# EAGLE board HMC6343-Breakout-Panel-v10 (EAGLE 6.6.0), part 1 of 2
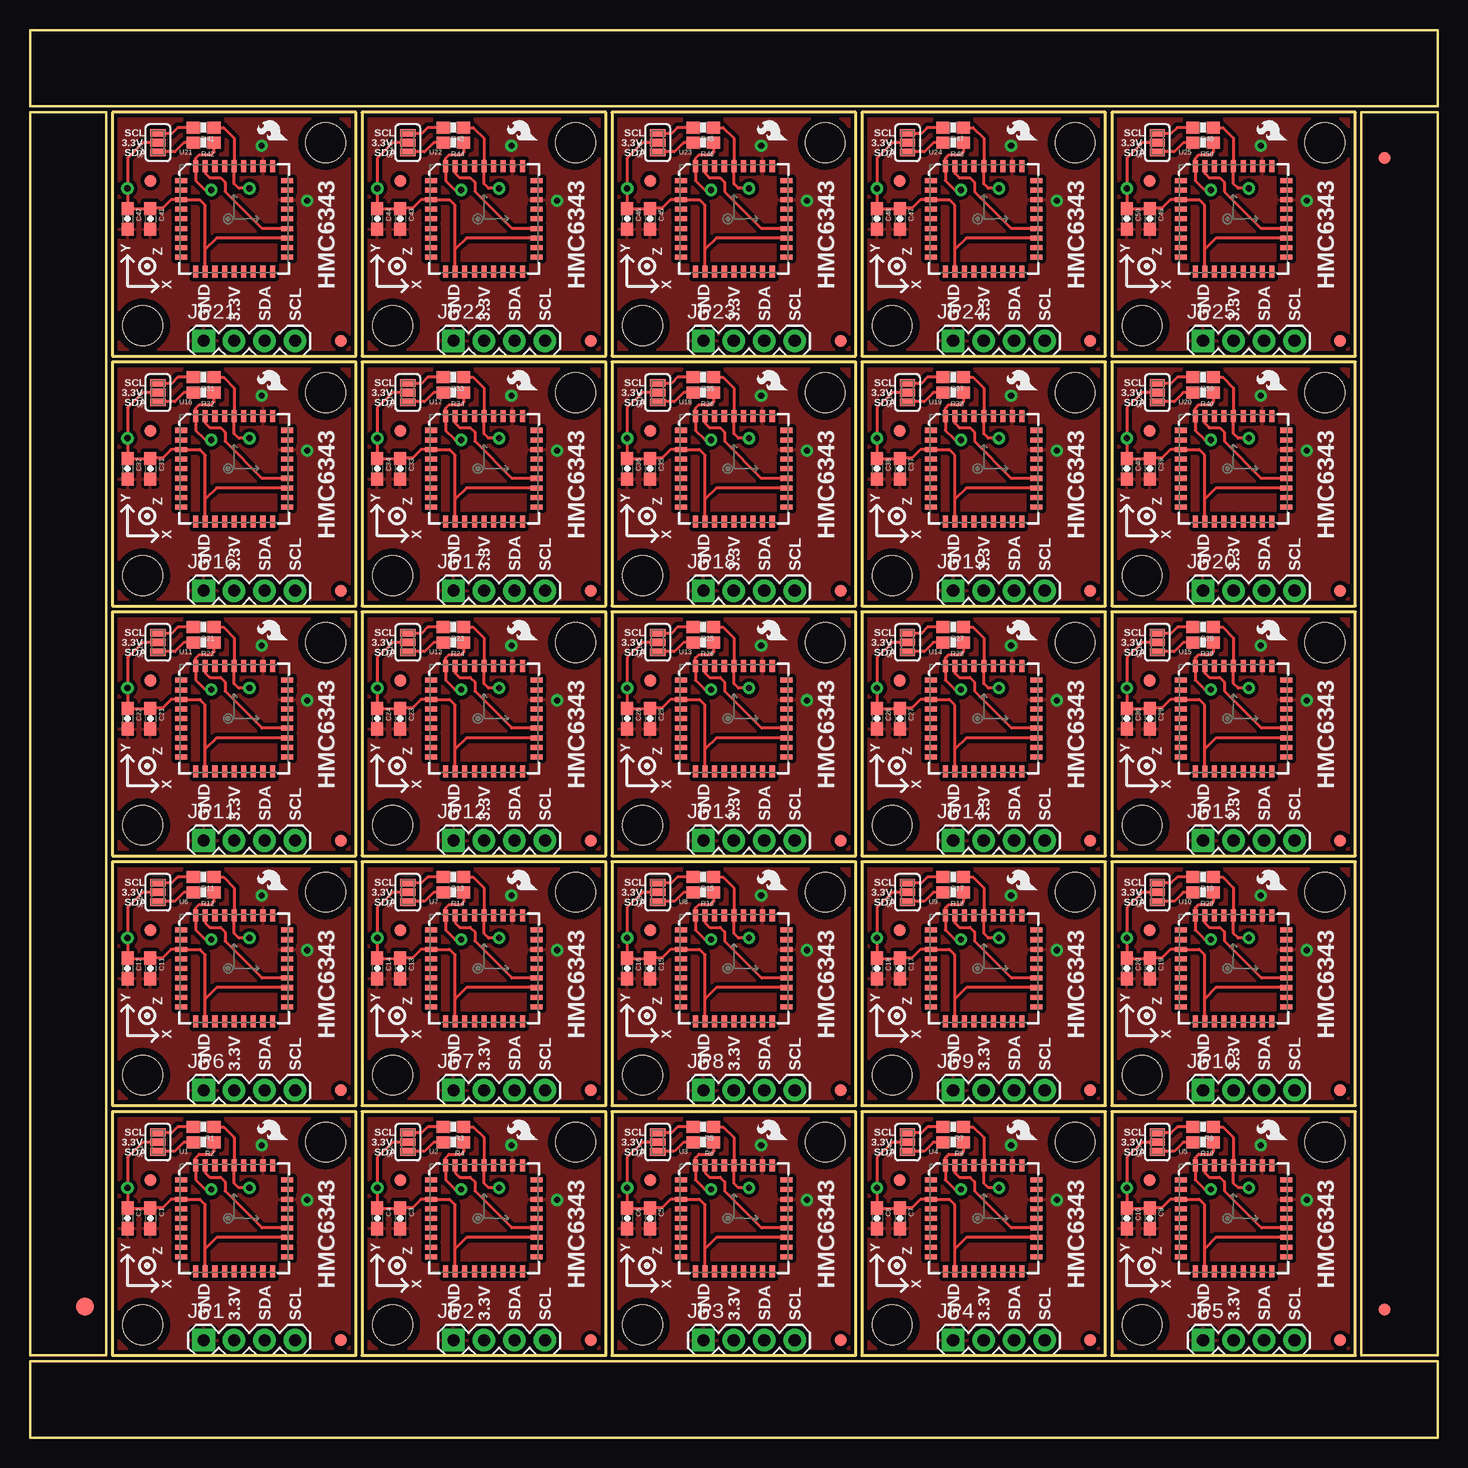
[diagram p0: board, top side]
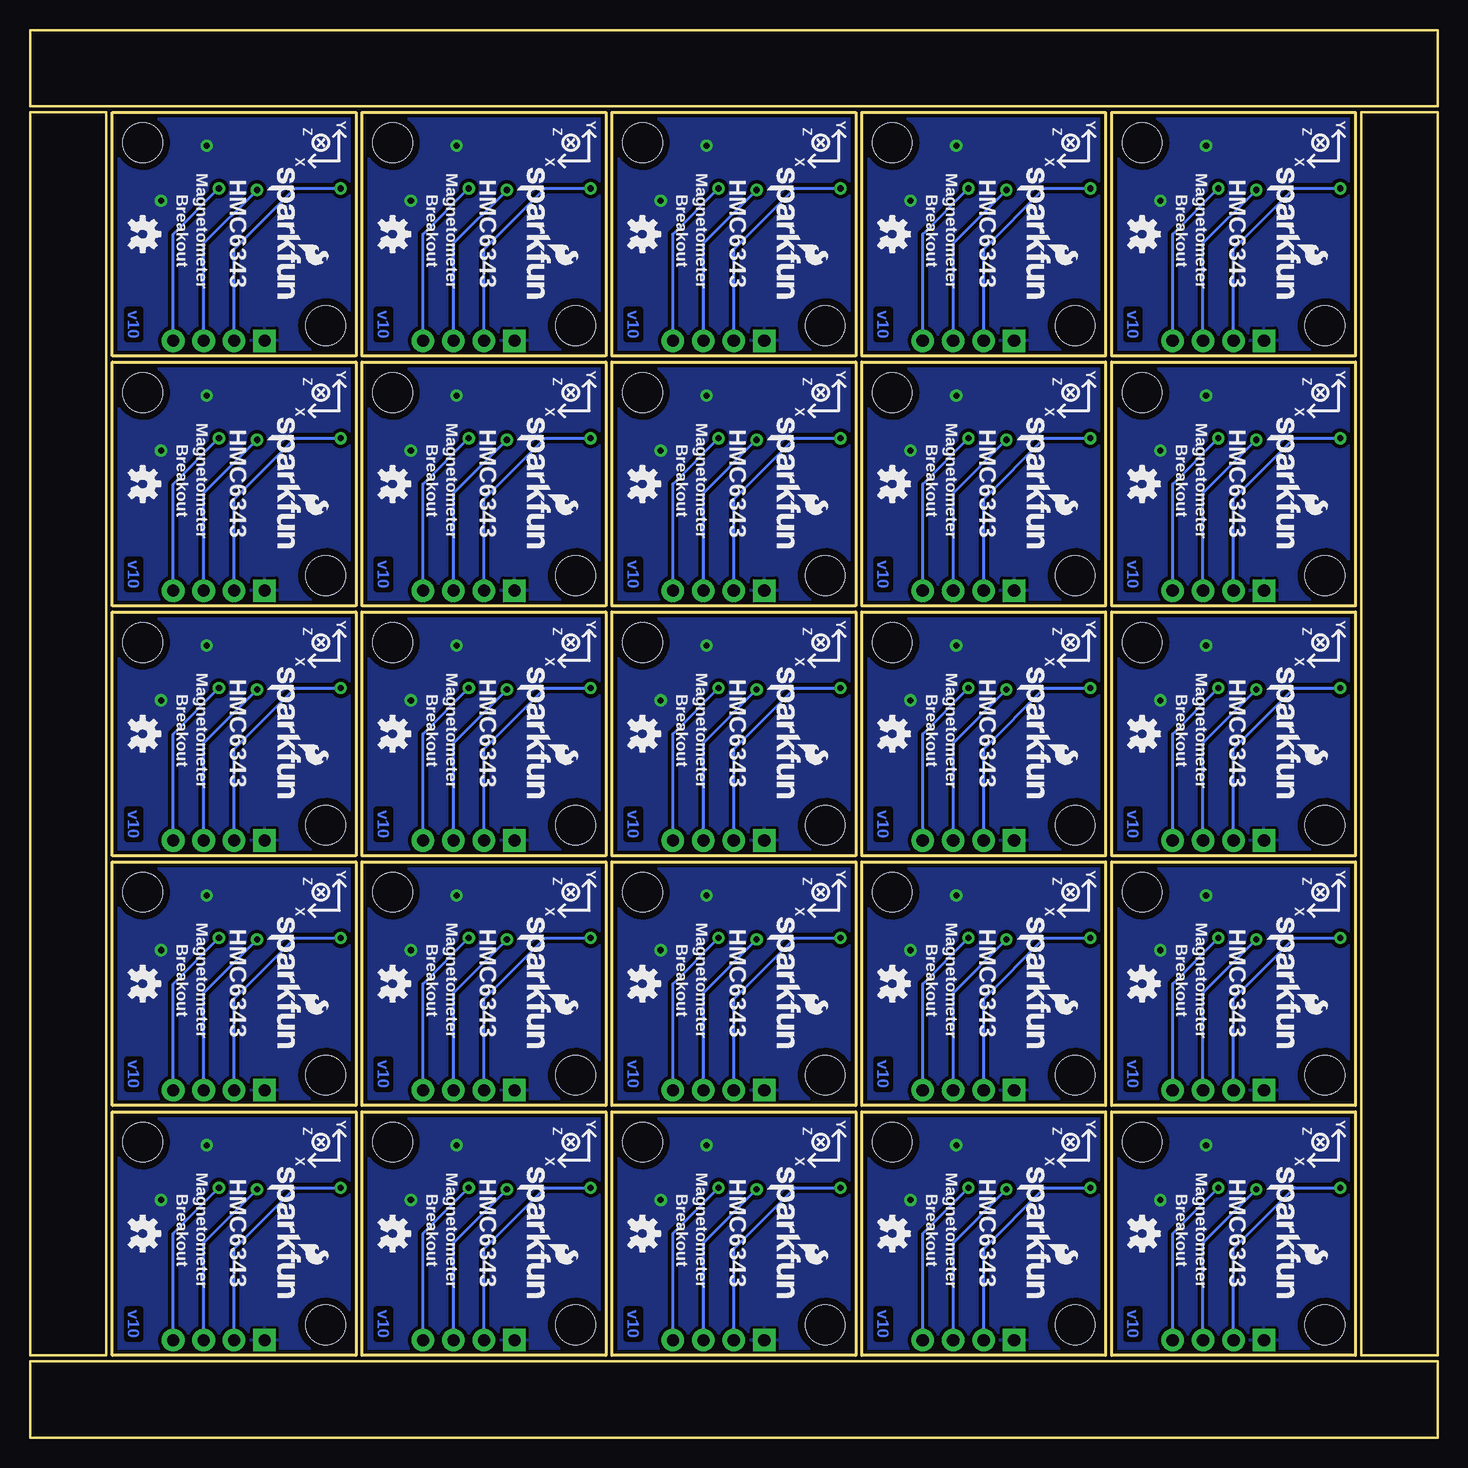
[diagram p1: board, bottom side, seen from below]

Size 117.35 x 117.35 mm. Coordinates in mm from the lower left corner, seen from the top.
Outline: 6.86,6.86 27.18,6.86 27.18,27.18 6.86,27.18 6.86,6.86
Outline: 27.69,6.86 48.01,6.86 48.01,27.18 27.69,27.18 27.69,6.86
Outline: 48.51,6.86 68.83,6.86 68.83,27.18 48.51,27.18 48.51,6.86
Outline: 69.34,6.86 89.66,6.86 89.66,27.18 69.34,27.18 69.34,6.86
Outline: 90.17,6.86 110.49,6.86 110.49,27.18 90.17,27.18 90.17,6.86
Outline: 6.86,27.69 27.18,27.69 27.18,48.01 6.86,48.01 6.86,27.69
Outline: 27.69,27.69 48.01,27.69 48.01,48.01 27.69,48.01 27.69,27.69
Outline: 48.51,27.69 68.83,27.69 68.83,48.01 48.51,48.01 48.51,27.69
Outline: 69.34,27.69 89.66,27.69 89.66,48.01 69.34,48.01 69.34,27.69
Outline: 90.17,27.69 110.49,27.69 110.49,48.01 90.17,48.01 90.17,27.69
Outline: 6.86,48.51 27.18,48.51 27.18,68.83 6.86,68.83 6.86,48.51
Outline: 27.69,48.51 48.01,48.51 48.01,68.83 27.69,68.83 27.69,48.51
Outline: 48.51,48.51 68.83,48.51 68.83,68.83 48.51,68.83 48.51,48.51
Outline: 69.34,48.51 89.66,48.51 89.66,68.83 69.34,68.83 69.34,48.51
Outline: 90.17,48.51 110.49,48.51 110.49,68.83 90.17,68.83 90.17,48.51
Outline: 6.86,69.34 27.18,69.34 27.18,89.66 6.86,89.66 6.86,69.34
Outline: 27.69,69.34 48.01,69.34 48.01,89.66 27.69,89.66 27.69,69.34
Outline: 48.51,69.34 68.83,69.34 68.83,89.66 48.51,89.66 48.51,69.34
Outline: 69.34,69.34 89.66,69.34 89.66,89.66 69.34,89.66 69.34,69.34
Outline: 90.17,69.34 110.49,69.34 110.49,89.66 90.17,89.66 90.17,69.34
Outline: 6.86,90.17 27.18,90.17 27.18,110.49 6.86,110.49 6.86,90.17
Outline: 27.69,90.17 48.01,90.17 48.01,110.49 27.69,110.49 27.69,90.17
Outline: 48.51,90.17 68.83,90.17 68.83,110.49 48.51,110.49 48.51,90.17
Outline: 69.34,90.17 89.66,90.17 89.66,110.49 69.34,110.49 69.34,90.17
Outline: 90.17,90.17 110.49,90.17 110.49,110.49 90.17,110.49 90.17,90.17
Outline: 6.35,6.86 6.35,110.49 0,110.49 0,6.86 6.35,6.86
Outline: 0,0 117.35,0 117.35,6.35 0,6.35 0,0
Outline: 117.35,6.86 117.35,110.49 111,110.49 111,6.86 117.35,6.86
Outline: 117.35,117.35 0,117.35 0,111 117.35,111 117.35,117.35
Copper layers (1*16): Top 0.035mm / dielectric 1.5mm / Bottom 0.035mm
Design rules "SparkFun": minimum track width 8mil, minimum drill 20mil, track to track 8mil, track to pad 8mil, pad to pad 8mil, via to via 8mil, smd to smd 8mil, copper to edge 8mil, drill to drill 8mil, minimum pad ring 12mil, minimum via ring 10mil, stop-mask expansion 4mil, vias tented up to drill 20mil, thermal gap 10mil

## Footprints (pad centres in the part's own frame; a part is rotated, then mirrored left to right if it is on the bottom)
0603-CAP = smd 1.1 x 1: 1 -0.85,0; 2 0.85,0
FIDUCIAL-1.5X3 = smd 1.5 x 1.5: 1 0,0
FIDUCIAL-1X2 = smd 1 x 1: 1 0,0
1X04 = drill 1.016 pad 1.88 square: 1 0,0 | drill 1.016 pad 1.88: 2 2.54,0; 3 5.08,0; 4 7.62,0
0603-RES = smd 1.1 x 1: 1 -0.85,0; 2 0.85,0
SJ_3_PASTE1&2&3 = smd 0.635 x 1.27: 1 -0.813,0; 2 0,0; 3 0.813,0
STAND-OFF = hole 3.302: 0,0
LCC36 = smd 1 x 0.42: 1 -4.4,3.2; 2 -4.4,2.4; 3 -4.4,1.6; 4 -4.4,0.8; 5 -4.4,0; 6 -4.4,-0.8; 7 -4.4,-1.6; 8 -4.4,-2.4; 9 -4.4,-3.2; 19 4.4,-3.2; 20 4.4,-2.4; 21 4.4,-1.6; 22 4.4,-0.8; 23 4.4,0; 24 4.4,0.8; 25 4.4,1.6; 26 4.4,2.4; 27 4.4,3.2 | smd 0.42 x 1: 10 -3.2,-4.4; 11 -2.4,-4.4; 12 -1.6,-4.4; 13 -0.8,-4.4; 14 0,-4.4; 15 0.8,-4.4; 16 1.6,-4.4; 17 2.4,-4.4; 18 3.2,-4.4; 28 3.2,4.4; 29 2.4,4.4; 30 1.6,4.4; 31 0.8,4.4; 32 0,4.4; 33 -0.8,4.4; 34 -1.6,4.4; 35 -2.4,4.4; 36 -3.2,4.4

## Placement (x,y rotation side)
C1  0.1uF  [0603-CAP]  10.03,18.29 270 top
C2  1.0uF  [0603-CAP]  8.13,18.29 270 top
C3  0.1uF  [0603-CAP]  30.86,18.29 270 top
C4  1.0uF  [0603-CAP]  28.96,18.29 270 top
C5  0.1uF  [0603-CAP]  51.69,18.29 270 top
C6  1.0uF  [0603-CAP]  49.78,18.29 270 top
C7  0.1uF  [0603-CAP]  72.52,18.29 270 top
C8  1.0uF  [0603-CAP]  70.61,18.29 270 top
C9  0.1uF  [0603-CAP]  93.34,18.29 270 top
C10  1.0uF  [0603-CAP]  91.44,18.29 270 top
C11  0.1uF  [0603-CAP]  10.03,39.12 270 top
C12  1.0uF  [0603-CAP]  8.13,39.12 270 top
C13  0.1uF  [0603-CAP]  30.86,39.12 270 top
C14  1.0uF  [0603-CAP]  28.96,39.12 270 top
C15  0.1uF  [0603-CAP]  51.69,39.12 270 top
C16  1.0uF  [0603-CAP]  49.78,39.12 270 top
C17  0.1uF  [0603-CAP]  72.52,39.12 270 top
C18  1.0uF  [0603-CAP]  70.61,39.12 270 top
C19  0.1uF  [0603-CAP]  93.34,39.12 270 top
C20  1.0uF  [0603-CAP]  91.44,39.12 270 top
C21  0.1uF  [0603-CAP]  10.03,59.94 270 top
C22  1.0uF  [0603-CAP]  8.13,59.94 270 top
C23  0.1uF  [0603-CAP]  30.86,59.94 270 top
C24  1.0uF  [0603-CAP]  28.96,59.94 270 top
C25  0.1uF  [0603-CAP]  51.69,59.94 270 top
C26  1.0uF  [0603-CAP]  49.78,59.94 270 top
C27  0.1uF  [0603-CAP]  72.52,59.94 270 top
C28  1.0uF  [0603-CAP]  70.61,59.94 270 top
C29  0.1uF  [0603-CAP]  93.34,59.94 270 top
C30  1.0uF  [0603-CAP]  91.44,59.94 270 top
C31  0.1uF  [0603-CAP]  10.03,80.77 270 top
C32  1.0uF  [0603-CAP]  8.13,80.77 270 top
C33  0.1uF  [0603-CAP]  30.86,80.77 270 top
C34  1.0uF  [0603-CAP]  28.96,80.77 270 top
C35  0.1uF  [0603-CAP]  51.69,80.77 270 top
C36  1.0uF  [0603-CAP]  49.78,80.77 270 top
C37  0.1uF  [0603-CAP]  72.52,80.77 270 top
C38  1.0uF  [0603-CAP]  70.61,80.77 270 top
C39  0.1uF  [0603-CAP]  93.34,80.77 270 top
C40  1.0uF  [0603-CAP]  91.44,80.77 270 top
C41  0.1uF  [0603-CAP]  10.03,101.6 270 top
C42  1.0uF  [0603-CAP]  8.13,101.6 270 top
C43  0.1uF  [0603-CAP]  30.86,101.6 270 top
C44  1.0uF  [0603-CAP]  28.96,101.6 270 top
C45  0.1uF  [0603-CAP]  51.69,101.6 270 top
C46  1.0uF  [0603-CAP]  49.78,101.6 270 top
C47  0.1uF  [0603-CAP]  72.52,101.6 270 top
C48  1.0uF  [0603-CAP]  70.61,101.6 270 top
C49  0.1uF  [0603-CAP]  93.34,101.6 270 top
C50  1.0uF  [0603-CAP]  91.44,101.6 270 top
E$1  [FIDUCIAL-1.5X3]  4.57,10.92 0 top
E$4  [FIDUCIAL-1X2]  112.9,10.67 0 top
E$6  [FIDUCIAL-1X2]  112.9,106.68 180 top
FID1  FIDUCIAL1X2  [FIDUCIAL-1X2]  25.91,8.13 0 top
FID2  FIDUCIAL1X2  [FIDUCIAL-1X2]  10.03,21.46 0 top
FID3  FIDUCIAL1X2  [FIDUCIAL-1X2]  46.74,8.13 0 top
FID4  FIDUCIAL1X2  [FIDUCIAL-1X2]  30.86,21.46 0 top
FID5  FIDUCIAL1X2  [FIDUCIAL-1X2]  67.56,8.13 0 top
FID6  FIDUCIAL1X2  [FIDUCIAL-1X2]  51.69,21.46 0 top
FID7  FIDUCIAL1X2  [FIDUCIAL-1X2]  88.39,8.13 0 top
FID8  FIDUCIAL1X2  [FIDUCIAL-1X2]  72.52,21.46 0 top
FID9  FIDUCIAL1X2  [FIDUCIAL-1X2]  109.22,8.13 0 top
FID10  FIDUCIAL1X2  [FIDUCIAL-1X2]  93.34,21.46 0 top
FID11  FIDUCIAL1X2  [FIDUCIAL-1X2]  25.91,28.96 0 top
FID12  FIDUCIAL1X2  [FIDUCIAL-1X2]  10.03,42.29 0 top
FID13  FIDUCIAL1X2  [FIDUCIAL-1X2]  46.74,28.96 0 top
FID14  FIDUCIAL1X2  [FIDUCIAL-1X2]  30.86,42.29 0 top
FID15  FIDUCIAL1X2  [FIDUCIAL-1X2]  67.56,28.96 0 top
FID16  FIDUCIAL1X2  [FIDUCIAL-1X2]  51.69,42.29 0 top
FID17  FIDUCIAL1X2  [FIDUCIAL-1X2]  88.39,28.96 0 top
FID18  FIDUCIAL1X2  [FIDUCIAL-1X2]  72.52,42.29 0 top
FID19  FIDUCIAL1X2  [FIDUCIAL-1X2]  109.22,28.96 0 top
FID20  FIDUCIAL1X2  [FIDUCIAL-1X2]  93.34,42.29 0 top
FID21  FIDUCIAL1X2  [FIDUCIAL-1X2]  25.91,49.78 0 top
FID22  FIDUCIAL1X2  [FIDUCIAL-1X2]  10.03,63.12 0 top
FID23  FIDUCIAL1X2  [FIDUCIAL-1X2]  46.74,49.78 0 top
FID24  FIDUCIAL1X2  [FIDUCIAL-1X2]  30.86,63.12 0 top
FID25  FIDUCIAL1X2  [FIDUCIAL-1X2]  67.56,49.78 0 top
FID26  FIDUCIAL1X2  [FIDUCIAL-1X2]  51.69,63.12 0 top
FID27  FIDUCIAL1X2  [FIDUCIAL-1X2]  88.39,49.78 0 top
FID28  FIDUCIAL1X2  [FIDUCIAL-1X2]  72.52,63.12 0 top
FID29  FIDUCIAL1X2  [FIDUCIAL-1X2]  109.22,49.78 0 top
FID30  FIDUCIAL1X2  [FIDUCIAL-1X2]  93.34,63.12 0 top
FID31  FIDUCIAL1X2  [FIDUCIAL-1X2]  25.91,70.61 0 top
FID32  FIDUCIAL1X2  [FIDUCIAL-1X2]  10.03,83.95 0 top
FID33  FIDUCIAL1X2  [FIDUCIAL-1X2]  46.74,70.61 0 top
FID34  FIDUCIAL1X2  [FIDUCIAL-1X2]  30.86,83.95 0 top
FID35  FIDUCIAL1X2  [FIDUCIAL-1X2]  67.56,70.61 0 top
FID36  FIDUCIAL1X2  [FIDUCIAL-1X2]  51.69,83.95 0 top
FID37  FIDUCIAL1X2  [FIDUCIAL-1X2]  88.39,70.61 0 top
FID38  FIDUCIAL1X2  [FIDUCIAL-1X2]  72.52,83.95 0 top
FID39  FIDUCIAL1X2  [FIDUCIAL-1X2]  109.22,70.61 0 top
FID40  FIDUCIAL1X2  [FIDUCIAL-1X2]  93.34,83.95 0 top
FID41  FIDUCIAL1X2  [FIDUCIAL-1X2]  25.91,91.44 0 top
FID42  FIDUCIAL1X2  [FIDUCIAL-1X2]  10.03,104.78 0 top
FID43  FIDUCIAL1X2  [FIDUCIAL-1X2]  46.74,91.44 0 top
FID44  FIDUCIAL1X2  [FIDUCIAL-1X2]  30.86,104.78 0 top
FID45  FIDUCIAL1X2  [FIDUCIAL-1X2]  67.56,91.44 0 top
FID46  FIDUCIAL1X2  [FIDUCIAL-1X2]  51.69,104.78 0 top
FID47  FIDUCIAL1X2  [FIDUCIAL-1X2]  88.39,91.44 0 top
FID48  FIDUCIAL1X2  [FIDUCIAL-1X2]  72.52,104.78 0 top
FID49  FIDUCIAL1X2  [FIDUCIAL-1X2]  109.22,91.44 0 top
FID50  FIDUCIAL1X2  [FIDUCIAL-1X2]  93.34,104.78 0 top
JP1  [1X04]  14.48,8.13 0 top
JP2  [1X04]  35.31,8.13 0 top
JP3  [1X04]  56.13,8.13 0 top
JP4  [1X04]  76.96,8.13 0 top
JP5  [1X04]  97.79,8.13 0 top
JP6  [1X04]  14.48,28.96 0 top
JP7  [1X04]  35.31,28.96 0 top
JP8  [1X04]  56.13,28.96 0 top
JP9  [1X04]  76.96,28.96 0 top
JP10  [1X04]  97.79,28.96 0 top
JP11  [1X04]  14.48,49.78 0 top
JP12  [1X04]  35.31,49.78 0 top
JP13  [1X04]  56.13,49.78 0 top
JP14  [1X04]  76.96,49.78 0 top
JP15  [1X04]  97.79,49.78 0 top
JP16  [1X04]  14.48,70.61 0 top
JP17  [1X04]  35.31,70.61 0 top
JP18  [1X04]  56.13,70.61 0 top
JP19  [1X04]  76.96,70.61 0 top
JP20  [1X04]  97.79,70.61 0 top
JP21  [1X04]  14.48,91.44 0 top
JP22  [1X04]  35.31,91.44 0 top
JP23  [1X04]  56.13,91.44 0 top
JP24  [1X04]  76.96,91.44 0 top
JP25  [1X04]  97.79,91.44 0 top
LOGO1  SFE_LOGO_FLAME.1_INCH  [SFE_LOGO_FLAME_.1]  21.84,24.51 90 top
LOGO2  SFE_LOGO_NAME_FLAME.1_INCH  [SFE_LOGO_NAME_FLAME_.1]  14.35,22.99 270 bottom
LOGO3  OSHW-LOGOS  [OSHW-LOGO-S]  24.64,17.02 270 bottom
LOGO4  SFE_LOGO_FLAME.1_INCH  [SFE_LOGO_FLAME_.1]  42.67,24.51 90 top
LOGO5  SFE_LOGO_NAME_FLAME.1_INCH  [SFE_LOGO_NAME_FLAME_.1]  35.18,22.99 270 bottom
LOGO6  OSHW-LOGOS  [OSHW-LOGO-S]  45.47,17.02 270 bottom
LOGO7  SFE_LOGO_FLAME.1_INCH  [SFE_LOGO_FLAME_.1]  63.5,24.51 90 top
LOGO8  SFE_LOGO_NAME_FLAME.1_INCH  [SFE_LOGO_NAME_FLAME_.1]  56.01,22.99 270 bottom
LOGO9  OSHW-LOGOS  [OSHW-LOGO-S]  66.29,17.02 270 bottom
LOGO10  SFE_LOGO_FLAME.1_INCH  [SFE_LOGO_FLAME_.1]  84.33,24.51 90 top
LOGO11  SFE_LOGO_NAME_FLAME.1_INCH  [SFE_LOGO_NAME_FLAME_.1]  76.83,22.99 270 bottom
LOGO12  OSHW-LOGOS  [OSHW-LOGO-S]  87.12,17.02 270 bottom
LOGO13  SFE_LOGO_FLAME.1_INCH  [SFE_LOGO_FLAME_.1]  105.16,24.51 90 top
LOGO14  SFE_LOGO_NAME_FLAME.1_INCH  [SFE_LOGO_NAME_FLAME_.1]  97.66,22.99 270 bottom
LOGO15  OSHW-LOGOS  [OSHW-LOGO-S]  107.95,17.02 270 bottom
LOGO16  SFE_LOGO_FLAME.1_INCH  [SFE_LOGO_FLAME_.1]  21.84,45.34 90 top
LOGO17  SFE_LOGO_NAME_FLAME.1_INCH  [SFE_LOGO_NAME_FLAME_.1]  14.35,43.81 270 bottom
LOGO18  OSHW-LOGOS  [OSHW-LOGO-S]  24.64,37.85 270 bottom
LOGO19  SFE_LOGO_FLAME.1_INCH  [SFE_LOGO_FLAME_.1]  42.67,45.34 90 top
LOGO20  SFE_LOGO_NAME_FLAME.1_INCH  [SFE_LOGO_NAME_FLAME_.1]  35.18,43.81 270 bottom
LOGO21  OSHW-LOGOS  [OSHW-LOGO-S]  45.47,37.85 270 bottom
LOGO22  SFE_LOGO_FLAME.1_INCH  [SFE_LOGO_FLAME_.1]  63.5,45.34 90 top
LOGO23  SFE_LOGO_NAME_FLAME.1_INCH  [SFE_LOGO_NAME_FLAME_.1]  56.01,43.81 270 bottom
LOGO24  OSHW-LOGOS  [OSHW-LOGO-S]  66.29,37.85 270 bottom
LOGO25  SFE_LOGO_FLAME.1_INCH  [SFE_LOGO_FLAME_.1]  84.33,45.34 90 top
LOGO26  SFE_LOGO_NAME_FLAME.1_INCH  [SFE_LOGO_NAME_FLAME_.1]  76.83,43.81 270 bottom
LOGO27  OSHW-LOGOS  [OSHW-LOGO-S]  87.12,37.85 270 bottom
LOGO28  SFE_LOGO_FLAME.1_INCH  [SFE_LOGO_FLAME_.1]  105.16,45.34 90 top
LOGO29  SFE_LOGO_NAME_FLAME.1_INCH  [SFE_LOGO_NAME_FLAME_.1]  97.66,43.81 270 bottom
LOGO30  OSHW-LOGOS  [OSHW-LOGO-S]  107.95,37.85 270 bottom
LOGO31  SFE_LOGO_FLAME.1_INCH  [SFE_LOGO_FLAME_.1]  21.84,66.17 90 top
LOGO32  SFE_LOGO_NAME_FLAME.1_INCH  [SFE_LOGO_NAME_FLAME_.1]  14.35,64.64 270 bottom
LOGO33  OSHW-LOGOS  [OSHW-LOGO-S]  24.64,58.67 270 bottom
LOGO34  SFE_LOGO_FLAME.1_INCH  [SFE_LOGO_FLAME_.1]  42.67,66.17 90 top
LOGO35  SFE_LOGO_NAME_FLAME.1_INCH  [SFE_LOGO_NAME_FLAME_.1]  35.18,64.64 270 bottom
LOGO36  OSHW-LOGOS  [OSHW-LOGO-S]  45.47,58.67 270 bottom
LOGO37  SFE_LOGO_FLAME.1_INCH  [SFE_LOGO_FLAME_.1]  63.5,66.17 90 top
LOGO38  SFE_LOGO_NAME_FLAME.1_INCH  [SFE_LOGO_NAME_FLAME_.1]  56.01,64.64 270 bottom
LOGO39  OSHW-LOGOS  [OSHW-LOGO-S]  66.29,58.67 270 bottom
LOGO40  SFE_LOGO_FLAME.1_INCH  [SFE_LOGO_FLAME_.1]  84.33,66.17 90 top
LOGO41  SFE_LOGO_NAME_FLAME.1_INCH  [SFE_LOGO_NAME_FLAME_.1]  76.83,64.64 270 bottom
LOGO42  OSHW-LOGOS  [OSHW-LOGO-S]  87.12,58.67 270 bottom
LOGO43  SFE_LOGO_FLAME.1_INCH  [SFE_LOGO_FLAME_.1]  105.16,66.17 90 top
LOGO44  SFE_LOGO_NAME_FLAME.1_INCH  [SFE_LOGO_NAME_FLAME_.1]  97.66,64.64 270 bottom
LOGO45  OSHW-LOGOS  [OSHW-LOGO-S]  107.95,58.67 270 bottom
LOGO46  SFE_LOGO_FLAME.1_INCH  [SFE_LOGO_FLAME_.1]  21.84,87 90 top
LOGO47  SFE_LOGO_NAME_FLAME.1_INCH  [SFE_LOGO_NAME_FLAME_.1]  14.35,85.47 270 bottom
LOGO48  OSHW-LOGOS  [OSHW-LOGO-S]  24.64,79.5 270 bottom
LOGO49  SFE_LOGO_FLAME.1_INCH  [SFE_LOGO_FLAME_.1]  42.67,87 90 top
LOGO50  SFE_LOGO_NAME_FLAME.1_INCH  [SFE_LOGO_NAME_FLAME_.1]  35.18,85.47 270 bottom
LOGO51  OSHW-LOGOS  [OSHW-LOGO-S]  45.47,79.5 270 bottom
LOGO52  SFE_LOGO_FLAME.1_INCH  [SFE_LOGO_FLAME_.1]  63.5,87 90 top
LOGO53  SFE_LOGO_NAME_FLAME.1_INCH  [SFE_LOGO_NAME_FLAME_.1]  56.01,85.47 270 bottom
LOGO54  OSHW-LOGOS  [OSHW-LOGO-S]  66.29,79.5 270 bottom
LOGO55  SFE_LOGO_FLAME.1_INCH  [SFE_LOGO_FLAME_.1]  84.33,87 90 top
LOGO56  SFE_LOGO_NAME_FLAME.1_INCH  [SFE_LOGO_NAME_FLAME_.1]  76.83,85.47 270 bottom
LOGO57  OSHW-LOGOS  [OSHW-LOGO-S]  87.12,79.5 270 bottom
LOGO58  SFE_LOGO_FLAME.1_INCH  [SFE_LOGO_FLAME_.1]  105.16,87 90 top
LOGO59  SFE_LOGO_NAME_FLAME.1_INCH  [SFE_LOGO_NAME_FLAME_.1]  97.66,85.47 270 bottom
LOGO60  OSHW-LOGOS  [OSHW-LOGO-S]  107.95,79.5 270 bottom
LOGO61  SFE_LOGO_FLAME.1_INCH  [SFE_LOGO_FLAME_.1]  21.84,107.82 90 top
LOGO62  SFE_LOGO_NAME_FLAME.1_INCH  [SFE_LOGO_NAME_FLAME_.1]  14.35,106.3 270 bottom
LOGO63  OSHW-LOGOS  [OSHW-LOGO-S]  24.64,100.33 270 bottom
LOGO64  SFE_LOGO_FLAME.1_INCH  [SFE_LOGO_FLAME_.1]  42.67,107.82 90 top
LOGO65  SFE_LOGO_NAME_FLAME.1_INCH  [SFE_LOGO_NAME_FLAME_.1]  35.18,106.3 270 bottom
LOGO66  OSHW-LOGOS  [OSHW-LOGO-S]  45.47,100.33 270 bottom
LOGO67  SFE_LOGO_FLAME.1_INCH  [SFE_LOGO_FLAME_.1]  63.5,107.82 90 top
LOGO68  SFE_LOGO_NAME_FLAME.1_INCH  [SFE_LOGO_NAME_FLAME_.1]  56.01,106.3 270 bottom
LOGO69  OSHW-LOGOS  [OSHW-LOGO-S]  66.29,100.33 270 bottom
LOGO70  SFE_LOGO_FLAME.1_INCH  [SFE_LOGO_FLAME_.1]  84.33,107.82 90 top
LOGO71  SFE_LOGO_NAME_FLAME.1_INCH  [SFE_LOGO_NAME_FLAME_.1]  76.83,106.3 270 bottom
LOGO72  OSHW-LOGOS  [OSHW-LOGO-S]  87.12,100.33 270 bottom
LOGO73  SFE_LOGO_FLAME.1_INCH  [SFE_LOGO_FLAME_.1]  105.16,107.82 90 top
LOGO74  SFE_LOGO_NAME_FLAME.1_INCH  [SFE_LOGO_NAME_FLAME_.1]  97.66,106.3 270 bottom
LOGO75  OSHW-LOGOS  [OSHW-LOGO-S]  107.95,100.33 270 bottom
R1  10K  [0603-RES]  14.48,25.91 180 top
R2  10K  [0603-RES]  14.48,24.64 180 top
R3  10K  [0603-RES]  35.31,25.91 180 top
R4  10K  [0603-RES]  35.31,24.64 180 top
R5  10K  [0603-RES]  56.13,25.91 180 top
R6  10K  [0603-RES]  56.13,24.64 180 top
R7  10K  [0603-RES]  76.96,25.91 180 top
R8  10K  [0603-RES]  76.96,24.64 180 top
R9  10K  [0603-RES]  97.79,25.91 180 top
R10  10K  [0603-RES]  97.79,24.64 180 top
R11  10K  [0603-RES]  14.48,46.74 180 top
R12  10K  [0603-RES]  14.48,45.47 180 top
R13  10K  [0603-RES]  35.31,46.74 180 top
R14  10K  [0603-RES]  35.31,45.47 180 top
R15  10K  [0603-RES]  56.13,46.74 180 top
R16  10K  [0603-RES]  56.13,45.47 180 top
R17  10K  [0603-RES]  76.96,46.74 180 top
R18  10K  [0603-RES]  76.96,45.47 180 top
R19  10K  [0603-RES]  97.79,46.74 180 top
R20  10K  [0603-RES]  97.79,45.47 180 top
R21  10K  [0603-RES]  14.48,67.56 180 top
R22  10K  [0603-RES]  14.48,66.29 180 top
R23  10K  [0603-RES]  35.31,67.56 180 top
R24  10K  [0603-RES]  35.31,66.29 180 top
R25  10K  [0603-RES]  56.13,67.56 180 top
R26  10K  [0603-RES]  56.13,66.29 180 top
R27  10K  [0603-RES]  76.96,67.56 180 top
R28  10K  [0603-RES]  76.96,66.29 180 top
R29  10K  [0603-RES]  97.79,67.56 180 top
R30  10K  [0603-RES]  97.79,66.29 180 top
R31  10K  [0603-RES]  14.48,88.39 180 top
R32  10K  [0603-RES]  14.48,87.12 180 top
R33  10K  [0603-RES]  35.31,88.39 180 top
R34  10K  [0603-RES]  35.31,87.12 180 top
R35  10K  [0603-RES]  56.13,88.39 180 top
R36  10K  [0603-RES]  56.13,87.12 180 top
R37  10K  [0603-RES]  76.96,88.39 180 top
R38  10K  [0603-RES]  76.96,87.12 180 top
R39  10K  [0603-RES]  97.79,88.39 180 top
R40  10K  [0603-RES]  97.79,87.12 180 top
R41  10K  [0603-RES]  14.48,109.22 180 top
R42  10K  [0603-RES]  14.48,107.95 180 top
R43  10K  [0603-RES]  35.31,109.22 180 top
R44  10K  [0603-RES]  35.31,107.95 180 top
R45  10K  [0603-RES]  56.13,109.22 180 top
R46  10K  [0603-RES]  56.13,107.95 180 top
R47  10K  [0603-RES]  76.96,109.22 180 top
R48  10K  [0603-RES]  76.96,107.95 180 top
R49  10K  [0603-RES]  97.79,109.22 180 top
R50  10K  [0603-RES]  97.79,107.95 180 top
SJ1  [SJ_3_PASTE1&2&3]  10.67,24.64 90 top
SJ2  [SJ_3_PASTE1&2&3]  31.5,24.64 90 top
SJ3  [SJ_3_PASTE1&2&3]  52.32,24.64 90 top
SJ4  [SJ_3_PASTE1&2&3]  73.15,24.64 90 top
SJ5  [SJ_3_PASTE1&2&3]  93.98,24.64 90 top
SJ6  [SJ_3_PASTE1&2&3]  10.67,45.47 90 top
SJ7  [SJ_3_PASTE1&2&3]  31.5,45.47 90 top
SJ8  [SJ_3_PASTE1&2&3]  52.32,45.47 90 top
SJ9  [SJ_3_PASTE1&2&3]  73.15,45.47 90 top
SJ10  [SJ_3_PASTE1&2&3]  93.98,45.47 90 top
SJ11  [SJ_3_PASTE1&2&3]  10.67,66.29 90 top
SJ12  [SJ_3_PASTE1&2&3]  31.5,66.29 90 top
SJ13  [SJ_3_PASTE1&2&3]  52.32,66.29 90 top
SJ14  [SJ_3_PASTE1&2&3]  73.15,66.29 90 top
SJ15  [SJ_3_PASTE1&2&3]  93.98,66.29 90 top
SJ16  [SJ_3_PASTE1&2&3]  10.67,87.12 90 top
SJ17  [SJ_3_PASTE1&2&3]  31.5,87.12 90 top
SJ18  [SJ_3_PASTE1&2&3]  52.32,87.12 90 top
SJ19  [SJ_3_PASTE1&2&3]  73.15,87.12 90 top
SJ20  [SJ_3_PASTE1&2&3]  93.98,87.12 90 top
SJ21  [SJ_3_PASTE1&2&3]  10.67,107.95 90 top
SJ22  [SJ_3_PASTE1&2&3]  31.5,107.95 90 top
SJ23  [SJ_3_PASTE1&2&3]  52.32,107.95 90 top
SJ24  [SJ_3_PASTE1&2&3]  73.15,107.95 90 top
SJ25  [SJ_3_PASTE1&2&3]  93.98,107.95 90 top
STANDOFF1  STAND-OFF  [STAND-OFF]  24.64,24.64 0 top
STANDOFF2  STAND-OFF  [STAND-OFF]  9.4,9.4 0 top
STANDOFF3  STAND-OFF  [STAND-OFF]  45.47,24.64 0 top
STANDOFF4  STAND-OFF  [STAND-OFF]  30.23,9.4 0 top
STANDOFF5  STAND-OFF  [STAND-OFF]  66.29,24.64 0 top
STANDOFF6  STAND-OFF  [STAND-OFF]  51.05,9.4 0 top
STANDOFF7  STAND-OFF  [STAND-OFF]  87.12,24.64 0 top
STANDOFF8  STAND-OFF  [STAND-OFF]  71.88,9.4 0 top
STANDOFF9  STAND-OFF  [STAND-OFF]  107.95,24.64 0 top
STANDOFF10  STAND-OFF  [STAND-OFF]  92.71,9.4 0 top
STANDOFF11  STAND-OFF  [STAND-OFF]  24.64,45.47 0 top
STANDOFF12  STAND-OFF  [STAND-OFF]  9.4,30.23 0 top
STANDOFF13  STAND-OFF  [STAND-OFF]  45.47,45.47 0 top
STANDOFF14  STAND-OFF  [STAND-OFF]  30.23,30.23 0 top
STANDOFF15  STAND-OFF  [STAND-OFF]  66.29,45.47 0 top
STANDOFF16  STAND-OFF  [STAND-OFF]  51.05,30.23 0 top
STANDOFF17  STAND-OFF  [STAND-OFF]  87.12,45.47 0 top
STANDOFF18  STAND-OFF  [STAND-OFF]  71.88,30.23 0 top
STANDOFF19  STAND-OFF  [STAND-OFF]  107.95,45.47 0 top
STANDOFF20  STAND-OFF  [STAND-OFF]  92.71,30.23 0 top
STANDOFF21  STAND-OFF  [STAND-OFF]  24.64,66.29 0 top
STANDOFF22  STAND-OFF  [STAND-OFF]  9.4,51.05 0 top
STANDOFF23  STAND-OFF  [STAND-OFF]  45.47,66.29 0 top
STANDOFF24  STAND-OFF  [STAND-OFF]  30.23,51.05 0 top
STANDOFF25  STAND-OFF  [STAND-OFF]  66.29,66.29 0 top
STANDOFF26  STAND-OFF  [STAND-OFF]  51.05,51.05 0 top
STANDOFF27  STAND-OFF  [STAND-OFF]  87.12,66.29 0 top
STANDOFF28  STAND-OFF  [STAND-OFF]  71.88,51.05 0 top
STANDOFF29  STAND-OFF  [STAND-OFF]  107.95,66.29 0 top
STANDOFF30  STAND-OFF  [STAND-OFF]  92.71,51.05 0 top
STANDOFF31  STAND-OFF  [STAND-OFF]  24.64,87.12 0 top
STANDOFF32  STAND-OFF  [STAND-OFF]  9.4,71.88 0 top
STANDOFF33  STAND-OFF  [STAND-OFF]  45.47,87.12 0 top
STANDOFF34  STAND-OFF  [STAND-OFF]  30.23,71.88 0 top
STANDOFF35  STAND-OFF  [STAND-OFF]  66.29,87.12 0 top
STANDOFF36  STAND-OFF  [STAND-OFF]  51.05,71.88 0 top
STANDOFF37  STAND-OFF  [STAND-OFF]  87.12,87.12 0 top
STANDOFF38  STAND-OFF  [STAND-OFF]  71.88,71.88 0 top
STANDOFF39  STAND-OFF  [STAND-OFF]  107.95,87.12 0 top
STANDOFF40  STAND-OFF  [STAND-OFF]  92.71,71.88 0 top
STANDOFF41  STAND-OFF  [STAND-OFF]  24.64,107.95 0 top
STANDOFF42  STAND-OFF  [STAND-OFF]  9.4,92.71 0 top
STANDOFF43  STAND-OFF  [STAND-OFF]  45.47,107.95 0 top
STANDOFF44  STAND-OFF  [STAND-OFF]  30.23,92.71 0 top
STANDOFF45  STAND-OFF  [STAND-OFF]  66.29,107.95 0 top
STANDOFF46  STAND-OFF  [STAND-OFF]  51.05,92.71 0 top
STANDOFF47  STAND-OFF  [STAND-OFF]  87.12,107.95 0 top
STANDOFF48  STAND-OFF  [STAND-OFF]  71.88,92.71 0 top
STANDOFF49  STAND-OFF  [STAND-OFF]  107.95,107.95 0 top
STANDOFF50  STAND-OFF  [STAND-OFF]  92.71,92.71 0 top
U1  HMC6343A  [LCC36]  17.02,18.29 0 top
U2  HMC6343A  [LCC36]  37.85,18.29 0 top
U3  HMC6343A  [LCC36]  58.67,18.29 0 top
U4  HMC6343A  [LCC36]  79.5,18.29 0 top
U5  HMC6343A  [LCC36]  100.33,18.29 0 top
U6  HMC6343A  [LCC36]  17.02,39.12 0 top
U7  HMC6343A  [LCC36]  37.85,39.12 0 top
U8  HMC6343A  [LCC36]  58.67,39.12 0 top
U9  HMC6343A  [LCC36]  79.5,39.12 0 top
U10  HMC6343A  [LCC36]  100.33,39.12 0 top
U11  HMC6343A  [LCC36]  17.02,59.94 0 top
U12  HMC6343A  [LCC36]  37.85,59.94 0 top
U13  HMC6343A  [LCC36]  58.67,59.94 0 top
U14  HMC6343A  [LCC36]  79.5,59.94 0 top
U15  HMC6343A  [LCC36]  100.33,59.94 0 top
U16  HMC6343A  [LCC36]  17.02,80.77 0 top
U17  HMC6343A  [LCC36]  37.85,80.77 0 top
U18  HMC6343A  [LCC36]  58.67,80.77 0 top
U19  HMC6343A  [LCC36]  79.5,80.77 0 top
U20  HMC6343A  [LCC36]  100.33,80.77 0 top
U21  HMC6343A  [LCC36]  17.02,101.6 0 top
U22  HMC6343A  [LCC36]  37.85,101.6 0 top
U23  HMC6343A  [LCC36]  58.67,101.6 0 top
U24  HMC6343A  [LCC36]  79.5,101.6 0 top
U25  HMC6343A  [LCC36]  100.33,101.6 0 top

## Library data of the parts
C1 C3 C5 C7 C9 C11 C13 C15 C17 C19 C21 C23 C25 C27 C29 C31 C33 C35 C37 C39 C41 C43 C45 C47 C49 = SparkFun-Capacitors; PROD_ID: CAP-00810
C2 C4 C6 C8 C10 C12 C14 C16 C18 C20 C22 C24 C26 C28 C30 C32 C34 C36 C38 C40 C42 C44 C46 C48 C50 = SparkFun-Capacitors; PROD_ID: CAP-00868
E$1 = SparkFun-Retired
E$4 E$6 FID1-FID50 LOGO1-LOGO75 = SparkFun-Aesthetics
JP1-JP25 = SparkFun-Connectors
R1-R50 = SparkFun-Resistors; PROD_ID: RES-00824
SJ1-SJ25 = SparkFun-Passives
STANDOFF1-STANDOFF50 = SparkFun-Electromechanical
U1-U25 = SparkFun-Sensors

## Nets
3.3V: C1.1 C2.1 JP1.2 SJ1.2 U1.3 U1.11 U1.21
3.3V1: C3.1 C4.1 JP2.2 SJ2.2 U2.3 U2.11 U2.21
3.3V2: C5.1 C6.1 JP3.2 SJ3.2 U3.3 U3.11 U3.21
3.3V3: C7.1 C8.1 JP4.2 SJ4.2 U4.3 U4.11 U4.21
3.3V4: C9.1 C10.1 JP5.2 SJ5.2 U5.3 U5.11 U5.21
3.3V5: C11.1 C12.1 JP6.2 SJ6.2 U6.3 U6.11 U6.21
3.3V6: C13.1 C14.1 JP7.2 SJ7.2 U7.3 U7.11 U7.21
3.3V7: C15.1 C16.1 JP8.2 SJ8.2 U8.3 U8.11 U8.21
3.3V8: C17.1 C18.1 JP9.2 SJ9.2 U9.3 U9.11 U9.21
3.3V9: C19.1 C20.1 JP10.2 SJ10.2 U10.3 U10.11 U10.21
3.3V10: C21.1 C22.1 JP11.2 SJ11.2 U11.3 U11.11 U11.21
3.3V11: C23.1 C24.1 JP12.2 SJ12.2 U12.3 U12.11 U12.21
3.3V12: C25.1 C26.1 JP13.2 SJ13.2 U13.3 U13.11 U13.21
3.3V13: C27.1 C28.1 JP14.2 SJ14.2 U14.3 U14.11 U14.21
3.3V14: C29.1 C30.1 JP15.2 SJ15.2 U15.3 U15.11 U15.21
3.3V15: C31.1 C32.1 JP16.2 SJ16.2 U16.3 U16.11 U16.21
3.3V16: C33.1 C34.1 JP17.2 SJ17.2 U17.3 U17.11 U17.21
3.3V17: C35.1 C36.1 JP18.2 SJ18.2 U18.3 U18.11 U18.21
3.3V18: C37.1 C38.1 JP19.2 SJ19.2 U19.3 U19.11 U19.21
3.3V19: C39.1 C40.1 JP20.2 SJ20.2 U20.3 U20.11 U20.21
3.3V20: C41.1 C42.1 JP21.2 SJ21.2 U21.3 U21.11 U21.21
3.3V21: C43.1 C44.1 JP22.2 SJ22.2 U22.3 U22.11 U22.21
3.3V22: C45.1 C46.1 JP23.2 SJ23.2 U23.3 U23.11 U23.21
3.3V23: C47.1 C48.1 JP24.2 SJ24.2 U24.3 U24.11 U24.21
3.3V24: C49.1 C50.1 JP25.2 SJ25.2 U25.3 U25.11 U25.21
GND: C1.2 C2.2 JP1.1 U1.25 U1.29
GND1: C3.2 C4.2 JP2.1 U2.25 U2.29
GND2: C5.2 C6.2 JP3.1 U3.25 U3.29
GND3: C7.2 C8.2 JP4.1 U4.25 U4.29
GND4: C9.2 C10.2 JP5.1 U5.25 U5.29
GND5: C11.2 C12.2 JP6.1 U6.25 U6.29
GND6: C13.2 C14.2 JP7.1 U7.25 U7.29
GND7: C15.2 C16.2 JP8.1 U8.25 U8.29
GND8: C17.2 C18.2 JP9.1 U9.25 U9.29
GND9: C19.2 C20.2 JP10.1 U10.25 U10.29
GND10: C21.2 C22.2 JP11.1 U11.25 U11.29
GND11: C23.2 C24.2 JP12.1 U12.25 U12.29
GND12: C25.2 C26.2 JP13.1 U13.25 U13.29
GND13: C27.2 C28.2 JP14.1 U14.25 U14.29
GND14: C29.2 C30.2 JP15.1 U15.25 U15.29
GND15: C31.2 C32.2 JP16.1 U16.25 U16.29
GND16: C33.2 C34.2 JP17.1 U17.25 U17.29
GND17: C35.2 C36.2 JP18.1 U18.25 U18.29
GND18: C37.2 C38.2 JP19.1 U19.25 U19.29
GND19: C39.2 C40.2 JP20.1 U20.25 U20.29
GND20: C41.2 C42.2 JP21.1 U21.25 U21.29
GND21: C43.2 C44.2 JP22.1 U22.25 U22.29
GND22: C45.2 C46.2 JP23.1 U23.25 U23.29
GND23: C47.2 C48.2 JP24.1 U24.25 U24.29
GND24: C49.2 C50.2 JP25.1 U25.25 U25.29
N$1: U1.22 U1.35
N$2: U2.22 U2.35
N$3: R3.2 SJ2.3
N$4: R1.2 SJ1.3
N$5: R2.2 SJ1.1
N$6: R4.2 SJ2.1
N$7: U3.22 U3.35
N$8: R5.2 SJ3.3
N$9: R6.2 SJ3.1
N$10: U4.22 U4.35
N$11: R7.2 SJ4.3
N$12: R8.2 SJ4.1
N$13: U5.22 U5.35
N$14: R9.2 SJ5.3
N$15: R10.2 SJ5.1
N$16: U6.22 U6.35
N$17: R11.2 SJ6.3
N$18: R12.2 SJ6.1
N$19: U7.22 U7.35
N$20: R13.2 SJ7.3
N$21: R14.2 SJ7.1
N$22: U8.22 U8.35
N$23: R15.2 SJ8.3
N$24: R16.2 SJ8.1
N$25: U9.22 U9.35
N$26: R17.2 SJ9.3
N$27: R18.2 SJ9.1
N$28: U10.22 U10.35
N$29: R19.2 SJ10.3
N$30: R20.2 SJ10.1
N$31: U11.22 U11.35
N$32: R21.2 SJ11.3
N$33: R22.2 SJ11.1
N$34: U12.22 U12.35
N$35: R23.2 SJ12.3
N$36: R24.2 SJ12.1
N$37: U13.22 U13.35
N$38: R25.2 SJ13.3
N$39: R26.2 SJ13.1
N$40: U14.22 U14.35
N$41: R27.2 SJ14.3
N$42: R28.2 SJ14.1
N$43: U15.22 U15.35
N$44: R29.2 SJ15.3
N$45: R30.2 SJ15.1
N$46: U16.22 U16.35
N$47: R31.2 SJ16.3
N$48: R32.2 SJ16.1
N$49: U17.22 U17.35
N$50: R33.2 SJ17.3
N$51: R34.2 SJ17.1
N$52: U18.22 U18.35
N$53: R35.2 SJ18.3
N$54: R36.2 SJ18.1
N$55: U19.22 U19.35
N$56: R37.2 SJ19.3
N$57: R38.2 SJ19.1
N$58: U20.22 U20.35
N$59: R39.2 SJ20.3
N$60: R40.2 SJ20.1
N$61: U21.22 U21.35
N$62: R41.2 SJ21.3
N$63: R42.2 SJ21.1
N$64: U22.22 U22.35
N$65: R43.2 SJ22.3
N$66: R44.2 SJ22.1
N$67: U23.22 U23.35
N$68: R45.2 SJ23.3
N$69: R46.2 SJ23.1
N$70: U24.22 U24.35
N$71: R47.2 SJ24.3
N$72: R48.2 SJ24.1
N$73: U25.22 U25.35
N$74: R49.2 SJ25.3
N$75: R50.2 SJ25.1
SCL: JP1.4 R1.1 U1.32
SCL1: JP2.4 R3.1 U2.32
SCL2: JP3.4 R5.1 U3.32
SCL3: JP4.4 R7.1 U4.32
SCL4: JP5.4 R9.1 U5.32
SCL5: JP6.4 R11.1 U6.32
SCL6: JP7.4 R13.1 U7.32
SCL7: JP8.4 R15.1 U8.32
SCL8: JP9.4 R17.1 U9.32
SCL9: JP10.4 R19.1 U10.32
SCL10: JP11.4 R21.1 U11.32
SCL11: JP12.4 R23.1 U12.32
SCL12: JP13.4 R25.1 U13.32
SCL13: JP14.4 R27.1 U14.32
SCL14: JP15.4 R29.1 U15.32
SCL15: JP16.4 R31.1 U16.32
SCL16: JP17.4 R33.1 U17.32
SCL17: JP18.4 R35.1 U18.32
SCL18: JP19.4 R37.1 U19.32
SCL19: JP20.4 R39.1 U20.32
SCL20: JP21.4 R41.1 U21.32
SCL21: JP22.4 R43.1 U22.32
SCL22: JP23.4 R45.1 U23.32
SCL23: JP24.4 R47.1 U24.32
SCL24: JP25.4 R49.1 U25.32
SDA: JP1.3 R2.1 U1.36
SDA1: JP2.3 R4.1 U2.36
SDA2: JP3.3 R6.1 U3.36
SDA3: JP4.3 R8.1 U4.36
SDA4: JP5.3 R10.1 U5.36
SDA5: JP6.3 R12.1 U6.36
SDA6: JP7.3 R14.1 U7.36
SDA7: JP8.3 R16.1 U8.36
SDA8: JP9.3 R18.1 U9.36
SDA9: JP10.3 R20.1 U10.36
SDA10: JP11.3 R22.1 U11.36
SDA11: JP12.3 R24.1 U12.36
SDA12: JP13.3 R26.1 U13.36
SDA13: JP14.3 R28.1 U14.36
SDA14: JP15.3 R30.1 U15.36
SDA15: JP16.3 R32.1 U16.36
SDA16: JP17.3 R34.1 U17.36
SDA17: JP18.3 R36.1 U18.36
SDA18: JP19.3 R38.1 U19.36
SDA19: JP20.3 R40.1 U20.36
SDA20: JP21.3 R42.1 U21.36
SDA21: JP22.3 R44.1 U22.36
SDA22: JP23.3 R46.1 U23.36
SDA23: JP24.3 R48.1 U24.36
SDA24: JP25.3 R50.1 U25.36